# Altium PCB Buck Boost Converter.PcbDoc
Units mil, origin at the board's own origin, x right, y up, seen from the top; angles counter-clockwise.
Board outline 2305 x 910 mil, 2 copper layers (Top Layer, Bottom Layer); 9 components, 5 nets, 28 pads, 4 vias.
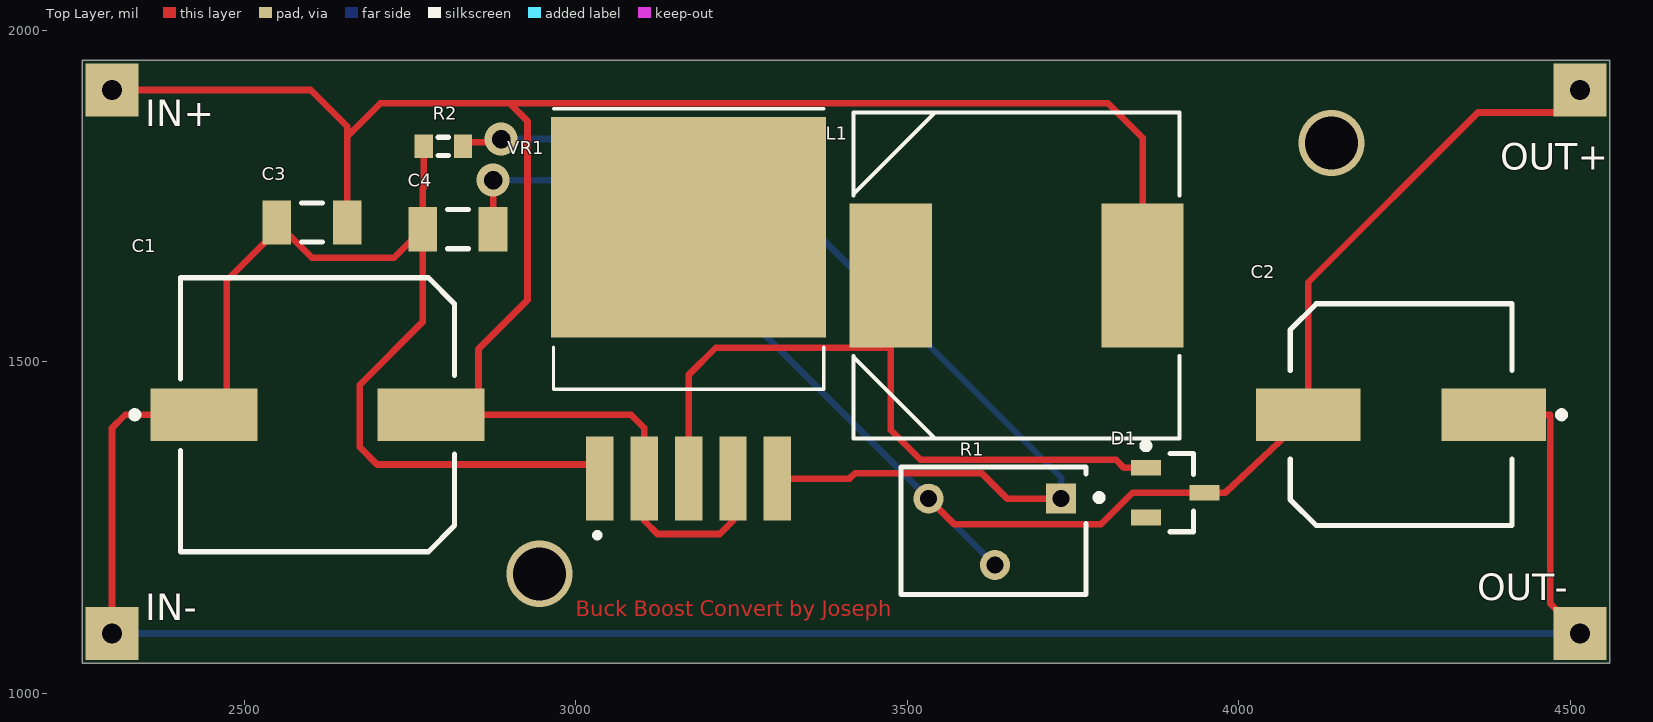
[diagram p0: Top Layer view]
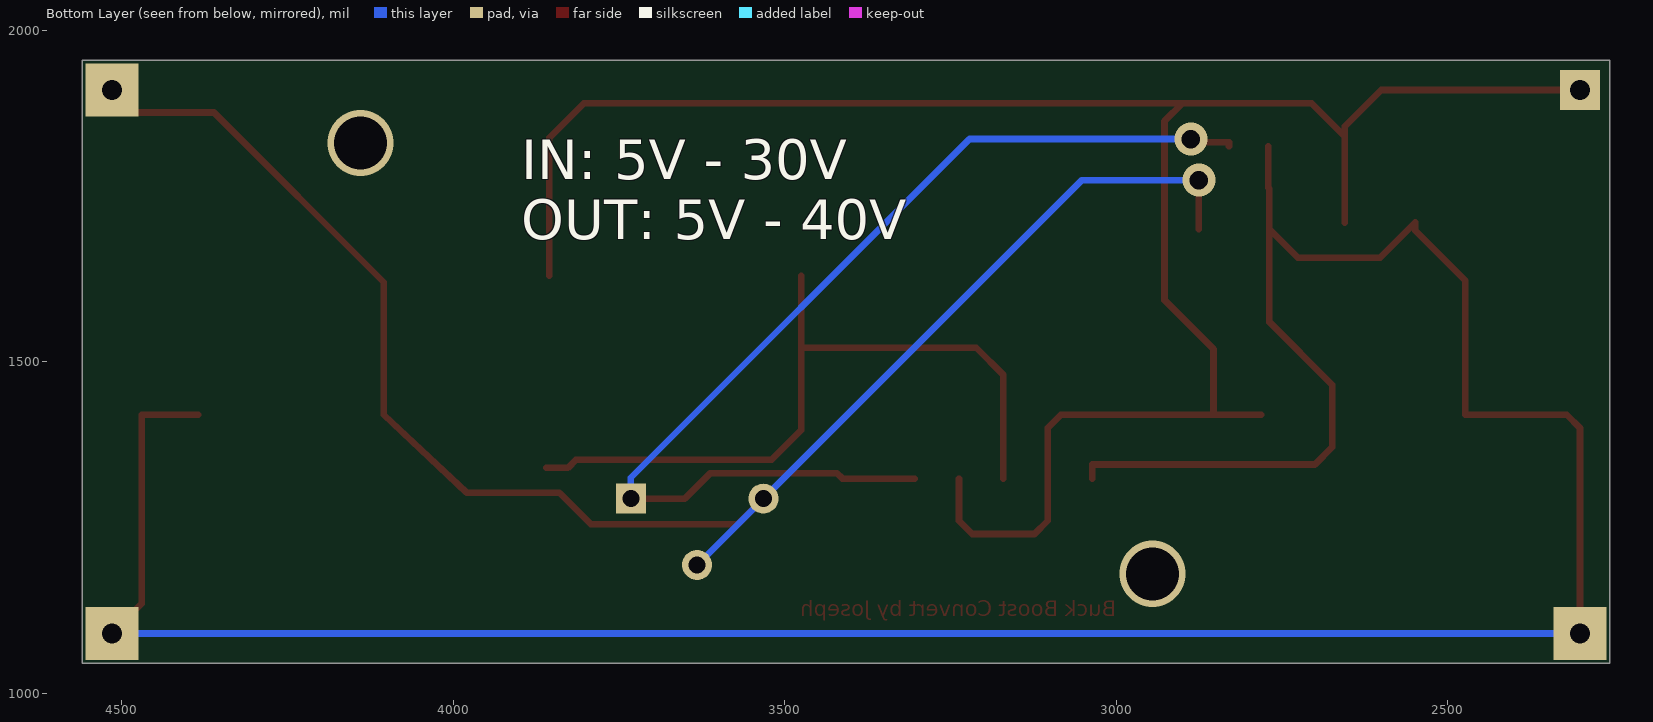
[diagram p1: Bottom Layer view, seen from below]
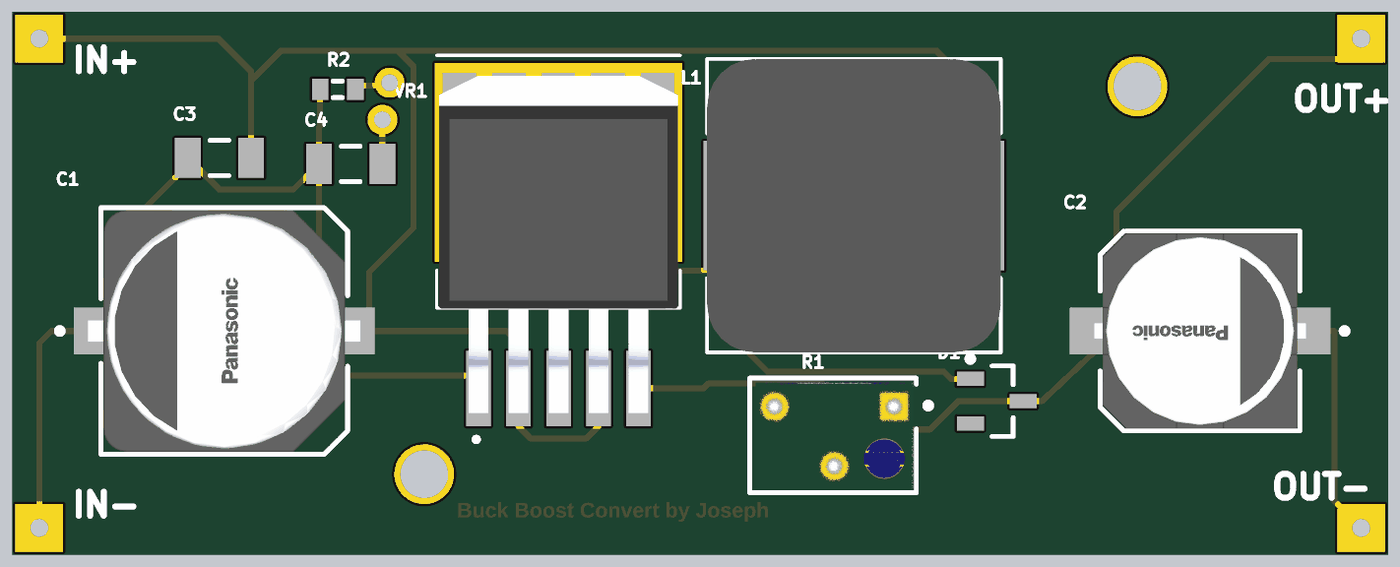
[diagram p2: 3D render of the assembled board from above, using the file's embedded part models]

## Layer stack, top to bottom
Top Solder: solder mask 0.4, Solder Resist, Dk 3.5
Top Layer: signal copper 1.4
Dielectric 1: dielectric 12.6, FR-4, Dk 4.8
Bottom Layer: signal copper 1.4
Bottom Solder: solder mask 0.4, Solder Resist, Dk 3.5

## Board outline
2255,1045 4560,1045 4560,1955 2255,1955

## Design rules (kind name [scope] priority, off if disabled: settings)
Clearance [All] p1: gap=10 ignorepadtopadclearanceinfootprint=FALSE except(0: Arc-Hole Track-Hole SMDPad-Hole THPad-Hole Via-Hole Fill-Hole Poly-Hole Region-Hole Text-Hole)
PolygonConnect [All] p1: connectstyle=Relief reliefconductorwidth=10 reliefentries=4 polygonreliefangle="90 Angle" airgapwidth=10
RoutingVias [All] p1: holewidth=28 width=50 viastyle="Through Hole" minholewidth=28 minwidth=50 maxholewidth=28 maxwidth=50
SolderMaskExpansion [All] p1: expansion=4 istentingtop=FALSE
Width [All] p1: maxlimit=10 minlimit=10 preferedwidth=10
30 further rules are at their usual default settings.

## Components (designator, comment, footprint, x,y, rotation, side; value= is the part's Value field where it differs from the comment)
C1 "220uF/35V" FP-HAG-MFG 2610,1420 r0 top
C2 "100uF/50V" FP-FKF-MFG 4245,1420 r180 top
C3 "Cap Semi" C1206 2601.85,1710 r0 top value=0.1uF
C4 "Cap Semi" C1206 2821.85,1700 r0 top value=0.1uF
D1 "Diode BAT17" SOT-23_N 3904.29,1302.4 r0 top
L1 "DR125-470-R" INDM125125X600N 3665,1630 r0 top
R1 "3266W-1-103LF" FP-3266W-MFG 3630,1245 r180 top value=10kΩ
R2 "Res3" J1-0603 2800,1825 r0 top value=330R
VR1 "XL6009" DPAK170P1435X465-6N 3170,1565 r90 top

## Footprints (in the part's own frame and the unit in brackets; to place one, negate y for a bottom-side part, rotate by r counter-clockwise, add the part's x,y. Pads: shape width x height; smd on the part's side, far side on the other; paste and mask are expansions set on the pad)
C1206 [mm] "Chip Capacitor, Body 3.2x1.6mm, IPC High Density"
  rect 1.1x1.7 smd: 1(-1.35,0) 2(1.35,0)
  silkscreen extent -0.4,-0.75 0.4,0.75, body extent -1.7,-0.9 1.7,0.9, height 1.3
DPAK170P1435X465-6N [mm]
  rect 3.21x1.05 smd: 1(-6.13,3.4) 2(-6.13,1.7) 3(-6.13,0) 4(-6.13,-1.7) 5(-6.13,-3.4)
  rect 8.46x10.53 smd paste-6: 6(3.5,0)
  silkscreen extent -8.4,-5.18 8.05,5.18, body extent -7.17,-5.08 7.17,5.08, height 4.65
FP-3266W-MFG [mm]
  rect 1.15x1.15 hole 0.65 paste-1000 mask+0: 1(-2.595,-1.23)
  round 1.15 hole 0.65 paste-1000 mask+0: 2(-0.055,1.31) 3(2.485,-1.23)
  silkscreen extent -4.18,-2.44 3.54,2.44, body extent -3.64,-2.54 3.64,2.54, height 0.25
FP-FKF-MFG [mm]
  rect 4x2 smd paste+0 mask+0: 1(-3.55,0) 2(3.55,0)
  silkscreen extent -6.28,-4.25 4.25,4.25, body extent -5.8,-4.5 5.8,4.5, height 0.25
FP-HAG-MFG [mm]
  rect 4.1x2 smd paste+0 mask+0: 1(-4.35,0) 2(4.35,0)
  silkscreen extent -7.12,-5.25 5.25,5.25, body extent -6.65,-5.5 6.65,5.5, height 0.25
INDM125125X600N [mil]
  rect 124x217 smd: 1(-190,0) 2(190,0)
  silkscreen extent -246,-246 246,246, body extent -246,-246 246,246, height 236
J1-0603 [mm] "Chip Resistor, Body 1.6x0.8mm, IPC High Density"
  rect 0.7x0.9 smd: 1(-0.75,0) 2(0.75,0)
  silkscreen extent -0.2,-0.35 0.2,0.35, body extent -0.85,-0.48 0.85,0.48, height 0.9
SOT-23_N [mm] "SOT23, 3-Leads, Body 2.9x1.3mm, Pitch 0.95mm, Lead Span 2.5mm, IPC Medium Density"
  rect 1.15x0.6 smd: 1(-1.125,0.95) 2(-1.125,-0.95) 3(1.125,0)
  silkscreen extent -1.25,-1.5 0.7,1.92, body extent -0.7,-1.5 0.7,1.5, height 1.1

## Part data
C1: library part CMP-00287-25559144-1, "EEEHA1V221AP Aluminum Electrolytic Capacitor, 220 uF, 35 V, ± 20%, 1000 hours @ 105°C, Radial Can - SMD", Lifecycle Status=Production, NexarPartId=25559144
C2: library part CMP-05427-000032-1, "CAP ALUM 100UF 20% 50V SMD", Capacitance=100uF, Case/Package=SMD/SMT, ESR (Equivalent Series Resistance)=340mR, Leakage Current=10mA, Max Operating Temperature=105°C, Min Operating Temperature=-55°C, Package Quantity=1, Ripple Current=350mA, Tolerance=20%, Voltage=50V, Construction=Cylindrical, Contact Plating=Tin, Diameter=8mm, Height=10.2mm, Height - Seated (Max)=0.402inch, Impedance=340mR, Lead Free="Lead Free", Length=10.2mm, Life (Hours)=5000Hour, Mount="Surface Mount", Number of Pins=2, Packaging="Tape and Reel", Radiation Hardening=No, REACH SVHC="No SVHC", Ripple Current (AC)=350mA, RoHS Compliant=Yes, Series=FK, Termination=SMD/SMT, Voltage Rating=50V, Voltage Rating (DC)=50V, Width=10mm
C3 C4: "Capacitor (Semiconductor SIM Model)", LatestRevisionDate=29-May-2009, LatestRevisionNote="IPC-7351 Footprint Added.", PackageDescription="Chip Capacitor", PackageReference=C1206, Published=8-Jun-2000, Publisher="Altium Limited"
D1: "Silicon RF Schottky Diode for Mixer Applications in the VHF/UHF Range", ComponentLink1Description="Manufacturer Link", ComponentLink1URL=http://www.infineon.com/, ComponentLink2Description=Datasheet, ComponentLink2URL=http://www.infineon.com/upload/Document/cmc_upload/documents/009/363/bat17series.pdf, DatasheetVersion=Oct-1999, LatestRevisionDate=29-May-2009, LatestRevisionNote="IPC-7351 Footprint Added.", Note="Pin 2 is not connected and not drawn.", PackageDescription="3-Pin SOT-23 Package 0.95 mm Pitch, 2.5 mm Lead Span", PackageReference=SOT-23, PackageVersion=Sep-2001, Published=21-Mar-2003, Publisher="Altium Limited"
L1: "Inductor, Wirewound, Shielded, 47uH, 74mOhm, 2.71A, Surface Mount, DR Series", Package="Non Standard Coiltronics / Eaton", Check_prices=https://www.snapeda.com/parts/DR125-470-R/Eaton/view-part/?ref=eda, MF=Eaton, MP=DR125-470-R, SnapEDA_Link=https://www.snapeda.com/parts/DR125-470-R/Eaton/view-part/?ref=snap
R1: library part CMP-07234-000016-1, "TRIMMER 10K OHM 0.25W PC PIN TOP", Manufacturer=Bourns, Package=3266W, Power Rating=0.25W, Resistance=10kΩ, Temperature="-55°C to +125°C", Temperature Coefficient=100ppm/°C, Temperature Range High=+125°C, Temperature Range Low=-55°C, Tolerance=10%, Automotive=No, Category=Res, ComponentLink2Description=Datasheet, ComponentLink2URL=https://www.bourns.com/docs/Product-Datasheets/3266.pdf, Composition=Cermet, Device Class L1="Passive Components", Device Class L2=Resistors, Device Class L3="Variable Resistors and Potentiometers", Digikey Description="TRIMMER 10K OHM 0.25W PC PIN TOP", Height=9.02mm, Lead Free=Yes, Manufacturer Part Number=3266W-1-103LF, Mouser Description="Trimmer Resistors - Through Hole 1/4 10Kohms 10% SQ W/Standoff Sealed", Octopart=https://octopart.com/3266w-1-103lf-bourns-81445, RoHS=TRUE, Series=3266, Standoff Height=0.43mm
R2: "Resistor", LatestRevisionDate=29-May-2009, LatestRevisionNote="IPC-7351 Footprint Added.", PackageDescription="Chip Resistor", PackageReference=J1-0603, Published=8-Jun-2000, Publisher="Altium Limited"
VR1: "The XL6009 regulator is a wide input range, current mode, DC/DC converter which is capable of generating either positive or negative output voltages.", Package="TO-263-5L XLSEMI", Availability="Not in stock", Check_prices=https://www.snapeda.com/parts/XL6009/XLSEMI/view-part/?ref=eda, MF=XLSEMI, MP=XL6009, Price=None, SnapEDA_Link=https://www.snapeda.com/parts/XL6009/XLSEMI/view-part/?ref=snap

## Free pads (board coordinates)
  rect 80x80 / inner round 60 / far side rect 80x80 hole 30: 8(4515,1910) 9(4515,1090) 10(2300,1090)
  rect 80x80 / inner round 60 / far side rect 60x60 hole 30: 11(2300,1910)

## Via types
v1: diameter 50, hole 28, Top Layer to Bottom Layer, 2 vias
v2: diameter 100/100 (per signal layer), hole 80, Top Layer to Bottom Layer, 2 vias

## Nets (pads, with @x,y where several pads share a name; then routed paths per layer and width w, separated by ;. In a path a pad name is that pad's centre, name@x,y a point inside that pad or via, vN(x,y) a via of type N, cw(c..) or ccw(c..) an arc to the next point about the centre after c; other vN are vias at no path point)
GND: C1.1 C2.1 C3.1 C4.1 pad.9 pad.10 R2.1 VR1.1 | length 4609.5
  Top Layer w10: pad.10 2300,1400 2320,1420 C1.1 2473,1420 2473,1622.3 2548.7,1698 C3.1 2601.7,1657 2725.7,1657 C4.1 ; R2.1 2770.47,1762.77 2768.7,1761 C4.1 ; VR1.1 3036.14,1345 2700,1345 2674,1371 2674,1465.3 2768.7,1560 C4.1 ; C2.1 4470,1420 4470,1135 pad.9
  Bottom Layer w10: pad.10 pad.9
NetC1_2: C1.2 C3.2 L1.2 pad.11 VR1.2 VR1.4 | length 3169.1
  Top Layer w10: pad.11 2600,1910 2655,1855 2655,1840 ; C3.2 2655,1840 ; C1.2 C1.2@2853,1420 ; VR1.4 3236.93,1260 3216.93,1240 3123.07,1240 3103.07,1260 VR1.2 3103.07,1400 3083.07,1420 C1.2@2853,1420 ; L1.2 3855,1838 3803,1890 2900,1890 ; 2655,1840 2705,1890 2900,1890 ; C1.2@2853,1420 2853,1519 2927,1593 2927,1863 2900,1890
NetD1_1: D1.1 L1.1 VR1.3 | length 1120
  Top Layer w10: VR1.3 3170,1480 3211,1521 3475,1521 ; L1.1 3475,1521 ; D1.1 3827.2,1339.8 3815,1352 3520,1352 3475,1397 3475,1521
NetR1_1: R1.1 R2.2 VR1.5 | length 1604.5
  Top Layer w10: R2.2 2829.53,1831 2887,1831 v1(2887,1836) ; VR1.5 3413,1323.66 3421.34,1332 3612,1332 3650.57,1293.43 R1.1
  Bottom Layer w10: v1(2887,1836) 3221,1836 3732.17,1324.83 R1.1
VOUT+: C2.2 C4.2 D1.3 pad.8 R1.2 R1.3 | length 2477
  Top Layer w10: C4.2 v1(2875,1774) ; R1.3 3570.59,1255 3792.6,1255 3840,1302.4 D1.3 3980,1302.4 C2.2@4105,1420 ; C2.2 C2.2@4105,1420 ; pad.8 4515,1876 4361,1876 4105,1620 C2.2@4105,1420
  Bottom Layer w10: v1(2875,1774) 3051.59,1774 R1.3 3532.17,1293.26 3632,1193.43 R1.2
pads on no net: D1.2 VR1.6
copper on no net:
  other v2: 2945,1180 4140,1830

## Other copper
Top Layer:
  text "Buck Boost Convert by Joseph" at 3000,1107.55 h40

## Silkscreen, mask and mechanical layers (free items; w line width, h text height)
Top Overlay:
  text "IN+" at 2350,1855 h40
  text "OUT+" at 4395,1790 h40
  text "OUT-" at 4360,1140 h40
  text "IN-" at 2350,1110 h40
Bottom Overlay:
  text "IN: 5V - 30V / OUT: 5V - 40V" at 3897.5,1685 h60